# Altium PCB carte_ecureuil2026v2.PcbDoc
Units mil, origin at the board's own origin, x right, y up, seen from the top; angles counter-clockwise.
Board outline 3267.72 x 2125.98 mil, 2 copper layers (Top Layer, Bottom Layer); 41 components, 34 nets, 132 pads, 0 vias.
Unrouted connection lines stored in the file: 30.
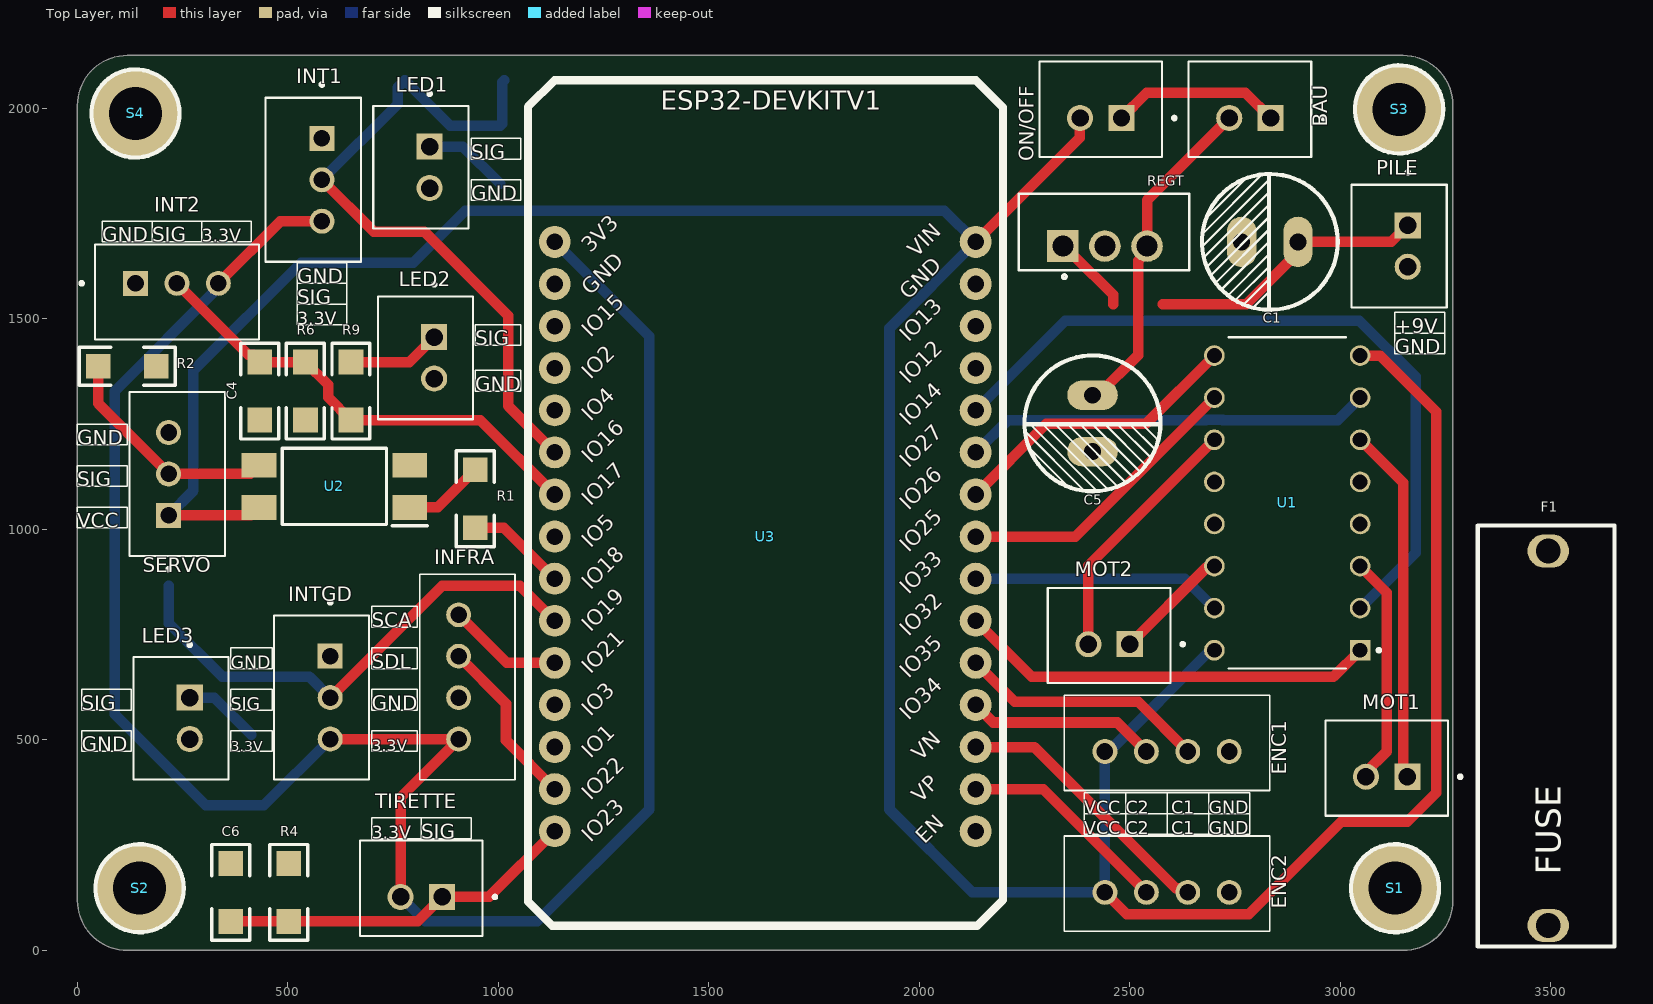
[diagram p0: Top Layer view]
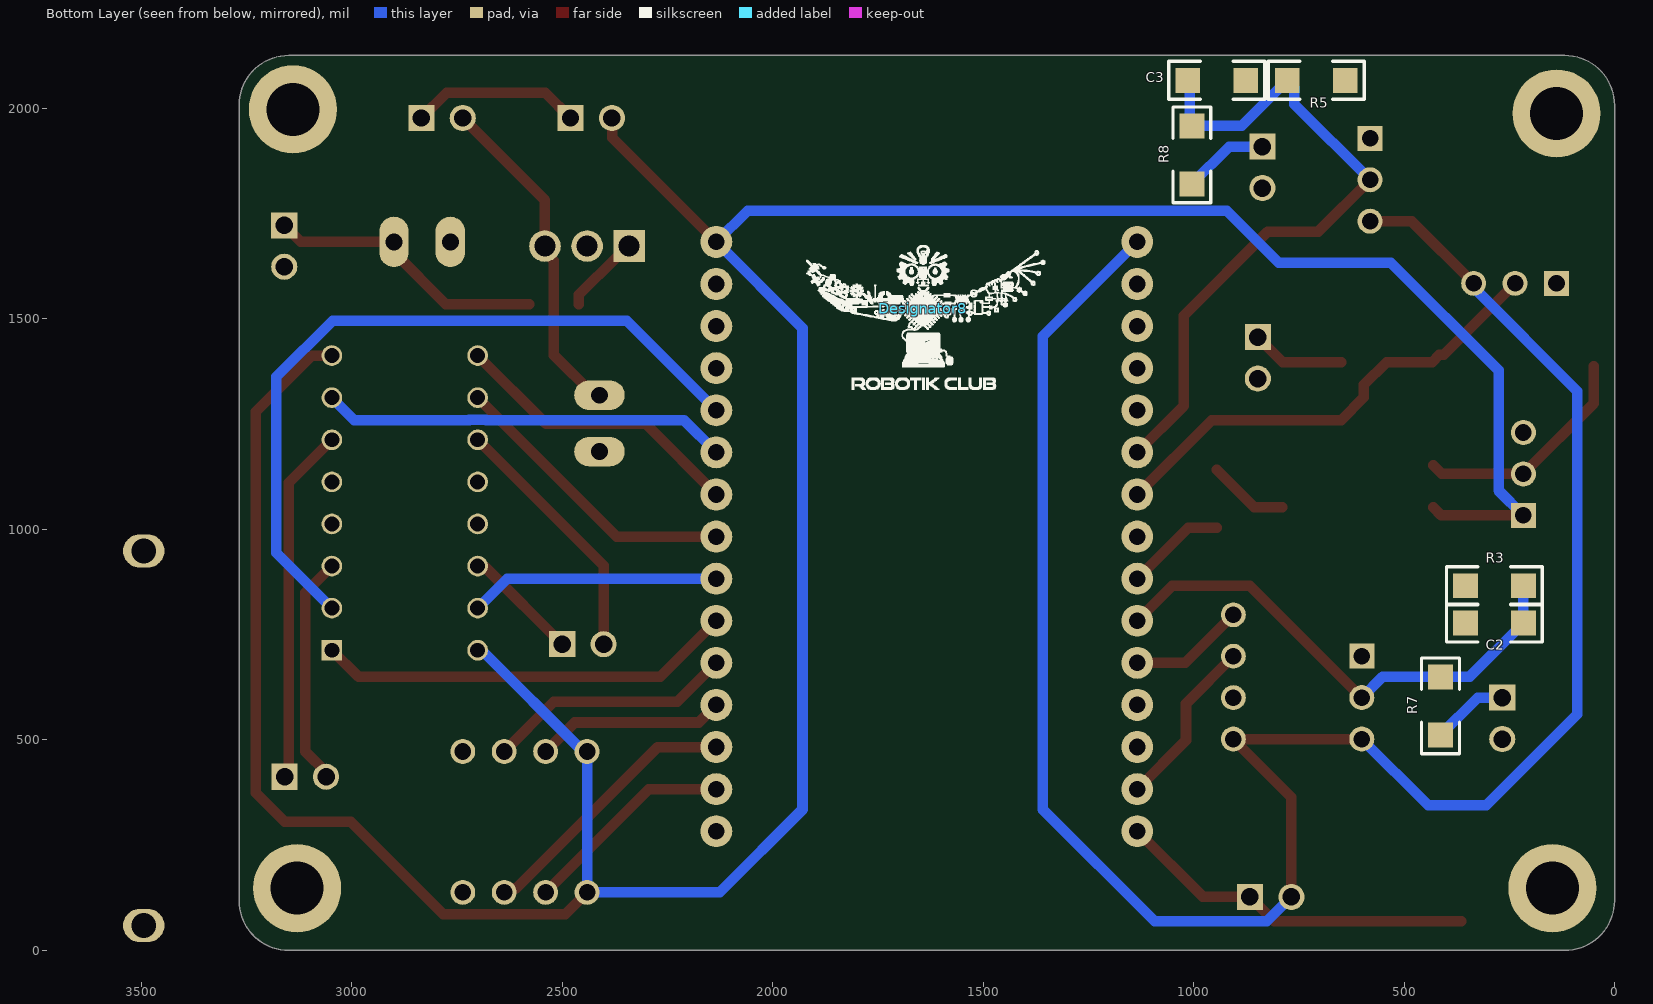
[diagram p1: Bottom Layer view, seen from below]

## Layer stack, top to bottom
Top Solder: solder mask 0.4, Solder Resist, Dk 3.5
Top Layer: signal copper 1.4
Dielectric 1: dielectric 12.6, FR-4, Dk 4.8
Bottom Layer: signal copper 1.4
Bottom Solder: solder mask 0.4, Solder Resist, Dk 3.5

## Board outline
118.11,0 3149.61,0 ccw(c3149.61,118.11) 3267.72,118.11 3267.72,2007.88 ccw(c3149.61,2007.88) 3149.61,2125.98 118.11,2125.98 ccw(c118.11,2007.87) 0,2007.87 0,118.11 ccw(c118.11,118.11)

## Design rules (kind name [scope] priority, off if disabled: settings)
Clearance [All] p1: gap=10 ignorepadtopadclearanceinfootprint=FALSE
PolygonConnect [All] p1: connectstyle=Relief reliefconductorwidth=10 reliefentries=4 polygonreliefangle="90 Angle" airgapwidth=10
RoutingVias [All] p1: holewidth=28 width=50 viastyle="Through Hole" minholewidth=28 minwidth=50 maxholewidth=28 maxwidth=50
SolderMaskExpansion [All] p1: expansion=4 istentingtop=FALSE
SupplyNets "Schematic Supply Nets_2" [InNet('GND')] p1: voltage=0.000
SupplyNets "Schematic Supply Nets_1" [InNet('VCC')] p2: voltage=0.000
SupplyNets "Schematic Supply Nets" [InNet('3.3V')] p3: voltage=0.000
Width [All] p1: maxlimit=50 minlimit=10 preferedwidth=10 minimp=50.000000 maximp=50.000000 favimp=50.000000
30 further rules are at their usual default settings.

## Components (designator, comment, footprint, x,y, rotation, side; value= is the part's Value field where it differs from the comment)
BAU "Header 2H" JST_B2B-XH-A_(LF)(SN) 2785.43,1998.03 r0 top
C1 "35V" Condensateur 2899.61,1683.07 r180 top value=100uF
C2 "Cap" "Capacitor 1206" 285.43,777.56 r180 bottom value=1µF
C3 "Cap" "Capacitor 1206" 944.88,2066.93 r0 bottom value=1µF
C4 "Cap" "Capacitor 1206" 433.07,1328.74 r90 top value=1µF
C5 "35V" Condensateur 2411.42,1318.9 r270 top value=100nF
C6 "Cap" "Capacitor 1206" 364.17,137.8 r270 top value=1µF
Designator8 "Comment" Logo_lowres 1643.7,1525.59 r180 bottom
ENC1 "Header 4" B4BXHALFSN 2440.94,472.44 r0 top
ENC2 "Header 4" B4BXHALFSN 2440.94,137.8 r0 top
F1 "2A max" Fuse 3494.09,59.05 r90 top
INFRA "Header 4" B4BXHALFSN 905.51,797.24 r270 top
INT1 "Header 3" JST_B3B-XH-A(LF)(SN) 560.04,1830.71 r90 top
INT2 "Header 3" JST_B3B-XH-A(LF)(SN) 236.22,1563.98 r180 top
INTGD "Header 3" JST_B3B-XH-A(LF)(SN) 579.72,600.39 r90 top
LED1 "Header 2H" JST_B2B-XH-A_(LF)(SN) 815.94,1860.24 r90 top
LED2 "Header 2H" JST_B2B-XH-A_(LF)(SN) 826.77,1407.48 r90 top
LED3 "Header 2H" JST_B2B-XH-A_(LF)(SN) 246.06,551.18 r90 top
MOT1 "Header 2H" JST_B2B-XH-A_(LF)(SN) 3110.24,433.07 r0 top
MOT2 "Header 2H" JST_B2B-XH-A_(LF)(SN) 2450.79,748.03 r0 top
ON/OFF "Header 2H" JST_B2B-XH-A_(LF)(SN) 2431.1,1998.03 r0 top
PILE "Header 2H" JST_B2B-XH-A_(LF)(SN) 3139.76,1673.23 r90 top
R1 "Res2" "Resistor 1206" 944.88,1072.83 r90 top value=150
R2 "Res2" "Resistor 1206" 118.11,1387.8 r180 top value=10K
R3 "Res2" "Resistor 1206" 285.43,866.14 r180 bottom value=10K
R4 "Res2" "Resistor 1206" 501.97,137.8 r270 top value=10K
R5 "Res2" "Resistor 1206" 708.66,2066.93 r0 bottom value=10K
R6 "Res2" "Resistor 1206" 541.34,1328.74 r90 top value=10K
R7 "Res2" "Resistor 1206" 413.39,580.71 r270 bottom value=330
R8 "Res2" "Resistor 1206" 1003.94,1889.76 r270 bottom value=330
R9 "Res2" "Resistor 1206" 649.61,1328.74 r90 top value=330
REGT "L7805ACV" TO254P460X1020X1945-3P 2440.94,1673.23 r90 top
S1 "Screw M3" "Screw M3" 3129.92,147.64 r0 top
S2 "Screw M3" "Screw M3" 147.64,147.64 r0 top
S3 "Screw M3" "Screw M3" 3139.76,1998.03 r0 top
S4 "Screw M3" "Screw M3" 137.8,1988.19 r0 top
SERVO "Header 3" JST_B3B-XH-A(LF)(SN) 237.2,1131.89 r270 top
TIRETTE "Header 2H" JST_B2B-XH-A_(LF)(SN) 816.93,147.64 r0 top (schematic designator tirette)
U1 "L293D" DIP880W50P254L2000H510Q16 2874.02,1062.99 r180 top
U2 "FOD817S" SOP254P1016X385-4N 610.24,1102.36 r180 top
U3 "ESP32-DEVKITC-32D" MODULE_ESP32-DEVKITV1 1633.86,1092.52 r0 top

## Footprints (in the part's own frame and the unit in brackets; to place one, negate y for a bottom-side part, rotate by r counter-clockwise, add the part's x,y. Pads: shape width x height; smd on the part's side, far side on the other; paste and mask are expansions set on the pad)
B4BXHALFSN [mm]
  round 1.5 hole 1: 1(0,0) 2(2.5,0) 3(5,0) 4(7.5,0)
  silkscreen extent -2.45,-2.35 9.95,3.4, body extent -2.45,-2.35 9.95,3.4, height 7.52
"Capacitor 1206" [mm]
  rect 1.5x1.5 smd: 1(-1.75,0) 2(1.75,0)
  silkscreen extent -2.89,-1.14 2.89,1.14, body extent -1.97,-0.99 1.97,0.96, height 1.3
Condensateur [mil]
  oval 70x120 hole 40: 1(0,0) 2(133.86,0)
  silkscreen extent -94,-161 228,161, body extent -93,-160 227,160, height 500
DIP880W50P254L2000H510Q16 [mm]
  rect 1.25x1.25 / inner round 1.25 / far side rect 1.25x1.25 hole 0.9: 1(-4.4,8.89)
  round 1.25 hole 0.9: 2(-4.4,6.35) 3(-4.4,3.81) 4(-4.4,1.27) 5(-4.4,-1.27) 6(-4.4,-3.81) 7(-4.4,-6.35) 8(-4.4,-8.89) 9(4.4,-8.89) 10(4.4,-6.35) 11(4.4,-3.81) 12(4.4,-1.27) 13(4.4,1.27) 14(4.4,3.81) 15(4.4,6.35) 16(4.4,8.89)
  silkscreen extent -5.63,-10 3.55,10, body extent -10,-4.62 10,4.62, height 5.1
Fuse [mm] "Porte-fusible monté sur circuit 10 (UL) A, 6.3 (VDE) A, fusible Cartouche, 893-0574"
  round 2 hole 3: 0(11.43,0)
  oval 2x2.5 hole 1.5: 1(0,0) 2(22.6,0)
  silkscreen extent -1.27,-4 24.13,4.25, body extent -1.27,-4.29 24.13,4.29, height 11.41
JST_B2B-XH-A_(LF)(SN) [mm]
  rect 1.575x1.575 / inner round 1.575 / far side rect 1.575x1.575 hole 1.05: 1(1.25,-0.525)
  round 1.575 hole 1.05: 2(-1.25,-0.525)
  silkscreen extent -3.7,-2.88 4.54,2.88, body extent -3.7,-2.88 3.7,2.88, height 7
JST_B3B-XH-A(LF)(SN) [mm]
  rect 1.508x1.508 / inner round 1.508 / far side rect 1.508x1.508 hole 1: 1(2.5,-0.525)
  round 1.508 hole 1: 2(0,-0.525) 3(-2.5,-0.525)
  silkscreen extent -4.95,-2.88 5.85,2.88, body extent -4.95,-2.88 4.95,2.88, height 7
Logo_lowres [mil]
  silkscreen extent -276,-194 291,148
MODULE_ESP32-DEVKITV1 [mil]
  round 76 / inner round 60 / far side round 76 hole 39.37: 1(-500,590.55) 2(-500,490.55) 3(-500,390.55) 4(-500,290.55) 5(-500,190.55) 6(-500,90.55) 7(-500,-9.45) 8(-500,-109.45) 9(-500,-209.45) 10(-500,-309.45) 11(-500,-409.45) 12(-500,-509.45) 13(-500,-609.45) 14(-500,-709.45) 15(-500,-809.45) 16(500,-809.45) 17(500,-709.45) 18(500,-609.45) 19(500,-509.45) 20(500,-409.45) 21(500,-309.45) 22(500,-209.45) 23(500,-109.45) 24(500,-9.45) 25(500,90.55) 26(500,190.55) 27(500,290.55) 28(500,390.55) 29(500,490.55) 30(500,590.55)
  silkscreen extent -563,-1034 565,974, body extent -560,-1027 562,978, height 283
"Resistor 1206" [mm]
  rect 1.5x1.5 smd: 1(-1.75,0) 2(1.75,0)
  silkscreen extent -2.89,-1.14 2.89,1.14, body extent -1.98,-0.95 1.98,0.93, height 0.55
"Screw M3" [mm] "M3 iso Screw"
  round 5.32 hole 3.2 unplated: 0(0,0)
  silkscreen extent -2.66,-2.66 2.66,2.66
SOP254P1016X385-4N [mm]
  rect 2.1x1.5 smd: 1(-4.55,1.27) 2(-4.55,-1.27) 3(4.55,-1.27) 4(4.55,1.27)
  silkscreen extent -5.6,-2.3 3.15,2.37, body extent -5.08,-2.3 5.08,2.3, height 3.85
TO254P460X1020X1945-3P [mm]
  rect 1.91x1.91 / inner round 1.91 / far side rect 1.91x1.91 hole 1.27: 1(0,2.54)
  round 1.91 hole 1.27: 2(0,0) 3(0,-2.54)
  silkscreen extent -1.96,-5.1 3.15,5.21, body extent -5.1,-2.25 5.1,2.25, height 19.68

## Part data
BAU LED1 LED2 LED3 MOT1 MOT2 ON/OFF PILE TIRETTE: "Header, 2-Pin, Right Angle", LatestRevisionDate=17-Jul-2002, LatestRevisionNote="Re-released for DXP Platform.", Publisher="Altium Limited"
C1 C5: library part "Cap Pol1", "Polarized Capacitor (Radial)", LatestRevisionDate=17-Jul-2002, LatestRevisionNote="Re-released for DXP Platform.", PackageDescription="Polarized Capacitor (Radial); 2 Leads", PackageReference=RB7.6-15, Published=8-Jun-2000, Publisher="Altium Limited"
C2 C3 C4 C6: "Capacitor", LatestRevisionDate=17-Jul-2002, LatestRevisionNote="Re-released for DXP Platform.", PackageDescription="Radial Cap, Thru-Hole; 2 Leads; 0.3 in Pin Spacing", PackageReference=RAD-0.3, Published=8-Jun-2000, Publisher="Altium Limited"
ENC1 ENC2 INFRA: "Header, 4-Pin", LatestRevisionDate=17-Jul-2002, LatestRevisionNote="Re-released for DXP Platform.", Publisher="Altium Limited"
F1: library part "Fuse 2", "Main Fuse", LatestRevisionDate=17-Jul-2002, LatestRevisionNote="Re-released for DXP Platform.", PackageDescription="Thru-Hole; 2 Leads", PackageReference=PIN-W2/E2.8, Published=8-Jun-2000, Publisher="Altium Limited"
INT1 INT2 INTGD SERVO: "Header, 3-Pin", LatestRevisionDate=17-Jul-2002, LatestRevisionNote="Re-released for DXP Platform.", Publisher="Altium Limited"
R1 R2 R3 R4 R5 R6 R7 R8 R9: "Resistor", LatestRevisionDate=17-Jul-2002, LatestRevisionNote="Re-released for DXP Platform.", PackageDescription="Axial Device, Thru-Hole; 2 Leads; 0.4 in Pin Spacing", PackageReference=AXIAL-0.4, Published=8-Jun-2000, Publisher="Altium Limited"
REGT: "Linear Voltage Regulator IC Positive Fixed 1 Output 1.5A TO-220", Package="TO-220-3 STMicroelectronics", Check_prices=https://www.snapeda.com/parts/L7805ACV/STMicroelectronics/view-part/?ref=eda, MF=STMicroelectronics, MP=L7805ACV, SnapEDA_Link=https://www.snapeda.com/parts/L7805ACV/STMicroelectronics/view-part/?ref=snap
U1: "Bipolar Motor Driver - Parallel 16-PowerDIP", Package="DIP-16 STMicroelectronics", Availability="In Stock", Check_prices=https://www.snapeda.com/parts/L293D/STMicroelectronics/view-part/?ref=eda, MF=STMicroelectronics, MP=L293D, Price=None, Purchase-URL=https://pricing.snapeda.com/search/part/L293D/?ref=eda, SnapEDA_Link=https://www.snapeda.com/parts/L293D/STMicroelectronics/view-part/?ref=snap
U2: library part Optoisolator1, "4-Pin Phototransistor Optocoupler", DatasheetVersion=Nov-2003, LatestRevisionDate=04-Mar-2005, LatestRevisionNote="Sch pins 3 & 4 Swapped.", PackageReference=DIP-4, Published=24-Mar-1999, Publisher="Altium Limited"
U3: "Eval Board For Esp-Wroom-32", Package=None, Availability=Unavailable, MF="Espressif Systems", MP=ESP32-DEVKITC-32D, Price=None, SnapEDA_Link=https://www.snapeda.com/parts/ESP32-DEVKITC-32D/Espressif%20Systems/view-part/?ref=snap

## Nets (pads, with @x,y where several pads share a name; then routed paths per layer and width w, separated by ;. In a path a pad name is that pad's centre, name@x,y a point inside that pad or via, vN(x,y) a via of type N, cw(c..) or ccw(c..) an arc to the next point about the centre after c; other vN are vias at no path point)
3.3V: ENC1.1 ENC2.1 INFRA.4 INT1.3 INT2.3 INTGD.3 TIRETTE.2 U3.1 | length 5002.7
  Top Layer w25: INT2.3 482.28,1732.28 INT1.3 ; INTGD.3 INFRA.4 767.72,364.17 TIRETTE.2
  Bottom Layer w25: INT2.3 334.65,1574.8 88.58,1328.74 88.58,561.02 305.12,344.49 442.91,344.49 INTGD.3 ; TIRETTE.2 825.79,68.9 1092.52,68.9 1358.27,334.65 1358.27,1458.66 U3.1
C11: ENC1.3 U3.20 | length 591.2
  Top Layer w25: U3.20 2226.38,590.55 2519.68,590.55 ENC1.3
C12: ENC1.2 U3.19 | length 451.3
  Top Layer w25: U3.19 2175.59,541.34 2470.47,541.34 ENC1.2
C21: ENC2.3 U3.18 | length 647
  Top Layer w25: U3.18 2272.83,483.07 2608.72,147.18 2628.41,147.18 ENC2.3
C22: ENC2.2 U3.17 | length 507.1
  Top Layer w25: U3.17 2294.09,383.07 ENC2.2
"enable 1": U1.1 U3.21 | length 994.9
  Top Layer w25: U3.21 2267.32,649.61 2983.86,649.61 U1.1
"enable 2": U1.9 U3.24 | length 703.6
  Top Layer w25: U3.24 2301.38,1250.59 2538.39,1250.59 U1.9
ESP_PWM: R1.1 U3.9 | length 239
  Top Layer w25: R1.1 1012.99,1003.94 U3.9
GND: C1.2 C2.1 C3.1 C5.2 C6.1 ENC1.4 ENC2.4 INFRA.3 LED1.2 LED2.2 LED3.2 PILE.2 R2.1 R3.1 R4.1 R5.1 REGT.2 SERVO.3 U1.4 U1.5 U1.12 U1.13 U2.2 U3.2 U3.29
I2C_SCL: INFRA.2 U3.14 | length 410.3
  Top Layer w25: INFRA.2 1018.06,586.27 1018.06,498.87 U3.14
I2C_SDA: INFRA.1 U3.11 | length 275.6
  Top Layer w25: INFRA.1 1019.69,683.07 U3.11
M1: MOT1.2 U1.3 | length 547.1
  Top Layer w25: U1.3 3110.24,850 3110.24,472.44 3061.02,423.23 MOT1.2
M2: MOT1.1 U1.6 | length 847.1
  Top Layer w25: U1.6 3149.61,1110.63 3149.61,422.24 MOT1.1
M3: MOT2.2 U1.11 | length 609.6
  Top Layer w25: MOT2.2 2401.57,913.78 U1.11
M4: MOT2.1 U1.14 | length 277.7
  Top Layer w25: MOT2.1 2681,908.36 2696.15,908.36 U1.14
NetBAU_1: BAU.1 ON/OFF.1 | length 404.1
  Top Layer w25: ON/OFF.1 2540.35,2037.4 2774.61,2037.4 BAU.1
NetBAU_2: BAU.2 C5.1 REGT.3 | length 800.5
  Top Layer w25: C5.1 2424.24,1318.9 2519.68,1414.34 2519.68,1638.39 2540.94,1659.65 2540.94,1782.09 BAU.2
NetC1_1: C1.1 F1.2 PILE.1 | length 673.8
  Top Layer w25: 2578.74,1535.43 2776.97,1535.43 2899.61,1658.07 C1.1 3121.06,1683.07 PILE.1
NetC4_1: C4.1 R6.1
NetF1_1: F1.1 REGT.1 | length 189.4
  Top Layer w25: REGT.1 2366.04,1648.13 2369.59,1648.13 2460.63,1557.09 2460.63,1535.43
NetLED1_1: LED1.1 R8.2 | length 204
  Bottom Layer w25: LED1.1 915.35,1909.45 R8.2
NetLED2_1: LED2.1 R9.2 | length 222.3
  Top Layer w25: R9.2 788.39,1397.64 LED2.1
NetLED3_1: LED3.1 R7.2 | length 183.3
  Bottom Layer w25: LED3.1 324.8,600.39 R7.2
NetR1_2: R1.2 U2.1 | length 192.5
  Top Layer w25: U2.1 855.51,1052.36 R1.2
OPT_PWM: R2.2 SERVO.2 U2.3 | length 548.3
  Top Layer w25: R2.2 49.21,1299.21 SERVO.2 410.63,1131.89 U2.3
"Sens1 M1": U1.2 U3.26 | length 1792.8
  Bottom Layer w25: U3.26 2346.85,1496.06 3045.32,1496.06 3179.13,1362.25 3179.13,944.88 U1.2
"Sens1 M2": U1.10 U3.23 | length 703.6
  Top Layer w25: U3.23 2370.87,983.07 U1.10
"Sens2 M1": U1.7 U3.25 | length 967.4
  Bottom Layer w25: U3.25 2210.63,1259.84 2681.02,1259.84 2681.28,1260.1 2720.3,1260.1 2720.56,1259.84 2994.09,1259.84 U1.7
"Sens2 M2": U1.15 U3.22 | length 596
  Bottom Layer w25: U3.22 2630.71,883.07 U1.15
switch_gd: C2.2 INTGD.2 R3.2 R7.1 U3.10 | length 1223.8
  Top Layer w25: INTGD.2 866.14,866.14 1050.79,866.14 U3.10
  Bottom Layer w25: R3.2 C2.2 344.49,649.61 R7.1 551.18,649.61 INTGD.2
switch_R1: C3.2 INT1.2 R5.2 R8.1 U3.6 | length 1648.4
  Top Layer w25: INT1.2 704.41,1707.01 824.36,1707.01 1023.62,1507.75 1023.62,1293.31 U3.6
  Bottom Layer w25: INT1.2 760.53,2010.53 760.53,2049.9 R5.2 885.83,1958.66 R8.1 1008.86,1963.58 1008.86,2062.01 C3.2
switch_R2: C4.2 INT2.2 R6.2 R9.1 U3.7 | length 1122.7
  Top Layer w25: INT2.2 406.2,1414.67 416.04,1414.67 C4.2 R6.2 595.47,1343.5 595.47,1313.98 R9.1 957.09,1259.84 U3.7
tirette: C6.2 R4.2 TIRETTE.1 U3.15 | length 858.4
  Top Layer w25: C6.2 R4.2 808.07,68.9 TIRETTE.1 977.76,126.97 U3.15
VCC: ON/OFF.2 SERVO.1 U1.8 U1.16 U2.4 U3.30 | length 7825.6
  Top Layer w25: SERVO.1 412.2,1033.46 U2.4 ; U3.30 2381.58,1930.79 2381.58,1977.05 ON/OFF.2 ; 2440.94,137.8 2492.97,85.77 2782.62,85.77 3001.97,305.12 3159.45,305.12 3228.35,374.02 3228.35,1279.53 3094.88,1412.99 U1.8
  Bottom Layer w25: SERVO.1 275.59,1092.52 275.59,1377.95 531.5,1633.86 797.24,1633.86 920.91,1757.52 2059.41,1757.52 U3.30 1929.13,1478.35 1929.13,334.65 2125.98,137.8 2440.94,137.8 2440.94,472.44 2450.59,472.44 2691.14,712.99 U1.16
pads on no net: F1.0 INT1.1 INT2.1 INTGD.1 S1.0 S2.0 S3.0 S4.0 U3.3 U3.4 U3.5 U3.8 U3.12 U3.13 U3.16 U3.27 U3.28

## Silkscreen, mask and mechanical layers (free items; w line width, h text height)
Top Overlay:
  lines w3: 177.17,1683.07 59.05,1683.07 59.05,1732.28 177.17,1732.28 ; 177.17,1683.07 177.17,1732.28 ; 177.17,1683.07 295.28,1683.07 ; 177.17,1683.07 177.17,1732.28 ; 177.17,1732.28 295.28,1732.28 ; 295.28,1683.07 413.39,1683.07 413.39,1732.28 295.28,1732.28 ; 295.28,1683.07 295.28,1732.28 ; 295.28,1683.07 295.28,1732.28 ; 521.65,1535.43 639.76,1535.43 ; 521.65,1535.43 521.65,1486.22 639.76,1486.22 639.76,1535.43 ; 521.65,1535.43 639.76,1535.43 ; 521.65,1535.43 521.65,1584.65 ; 521.65,1584.65 639.76,1584.65 ; 521.65,1584.65 639.76,1584.65 ; 521.65,1584.65 521.65,1633.86 639.76,1633.86 639.76,1584.65 ; 639.76,1535.43 639.76,1584.65 ; 816.93,265.75 935.04,265.75 935.04,314.96 816.93,314.96 ; 816.93,265.75 816.93,314.96 ; 816.93,265.75 698.82,265.75 698.82,314.96 816.93,314.96 ; 816.93,265.75 816.93,314.96 ; 2391.73,324.8 2490.16,324.8 ; 2391.73,324.8 2391.73,374.02 2490.16,374.02 ; 2391.73,324.8 2490.16,324.8 ; 2391.73,324.8 2391.73,275.59 2490.16,275.59 ; 2490.16,275.59 2588.58,275.59 ; 2490.16,275.59 2490.16,324.8 ; 2490.16,275.59 2490.16,324.8 ; 2490.16,324.8 2588.58,324.8 ; 2490.16,324.8 2490.16,374.02 ; 2490.16,324.8 2588.58,324.8 ; 2490.16,324.8 2490.16,374.02 ; 2490.16,374.02 2588.58,374.02 ; 2588.58,275.59 2588.58,324.8 ; 2588.58,275.59 2687.01,275.59 ; 2588.58,275.59 2588.58,324.8 ; 2588.58,324.8 2687.01,324.8 ; 2588.58,324.8 2588.58,374.02 ; 2588.58,324.8 2588.58,374.02 ; 2588.58,324.8 2687.01,324.8 ; 2588.58,374.02 2687.01,374.02 ; 2687.01,275.59 2785.43,275.59 2785.43,324.8 ; 2687.01,275.59 2687.01,324.8 ; 2687.01,275.59 2687.01,324.8 ; 2687.01,324.8 2687.01,374.02 ; 2687.01,324.8 2785.43,324.8 ; 2687.01,324.8 2687.01,374.02 ; 2687.01,324.8 2785.43,324.8 ; 2687.01,374.02 2785.43,374.02 2785.43,324.8 ; 3129.92,1466.54 3248.03,1466.54 ; 3129.92,1466.54 3129.92,1417.32 3248.03,1417.32 3248.03,1466.54 ; 3129.92,1466.54 3248.03,1466.54 ; 3129.92,1466.54 3129.92,1515.75 3248.03,1515.75 3248.03,1466.54 ; 0,1003.94 118.11,1003.94 118.11,1053.15 0,1053.15 0,1003.94 ; 0,1102.36 118.11,1102.36 118.11,1151.57 0,1151.57 0,1102.36 ; 0,1200.79 118.11,1200.79 118.11,1250 0,1250 0,1200.79 ; 9.84,472.44 127.95,472.44 127.95,521.65 9.84,521.65 9.84,472.44 ; 9.84,570.87 127.95,570.87 127.95,620.08 9.84,620.08 9.84,570.87 ; 364.17,472.44 462.6,472.44 462.6,521.65 364.17,521.65 364.17,472.44 ; 364.17,570.87 462.6,570.87 462.6,620.08 364.17,620.08 364.17,570.87 ; 364.17,669.29 462.6,669.29 462.6,718.5 364.17,718.5 364.17,669.29 ; 698.82,472.44 807.09,472.44 807.09,521.65 698.82,521.65 698.82,472.44 ; 698.82,570.87 807.09,570.87 807.09,620.08 698.82,620.08 698.82,570.87 ; 698.82,669.29 807.09,669.29 807.09,718.5 698.82,718.5 698.82,669.29 ; 698.82,767.72 807.09,767.72 807.09,816.93 698.82,816.93 698.82,767.72 ; 935.04,1781.5 1053.15,1781.5 1053.15,1830.71 935.04,1830.71 935.04,1781.5 ; 935.04,1879.92 1053.15,1879.92 1053.15,1929.13 935.04,1929.13 935.04,1879.92 ; 944.88,1328.74 1053.15,1328.74 1053.15,1377.95 944.88,1377.95 944.88,1328.74 ; 944.88,1437.01 1053.15,1437.01 1053.15,1486.22 944.88,1486.22 944.88,1437.01
  text "SIG" at 935.04,1879.92 h35
  text "GND" at 935.04,1781.5 h35
  text "GND" at 59.06,1683.07 h35
  text "SIG" at 177.17,1683.07 h35
  text "3.3V" at 295.28,1683.07 h30
  text "GND" at 521.65,1584.65 h35
  text "SIG" at 521.65,1535.43 h35
  text "3.3V" at 521.65,1486.22 h30
  text "+9V" at 3129.92,1466.54 h35
  text "SIG" at 944.88,1437.01 h35
  text "GND" at 3129.92,1417.32 h35
  text "GND" at 944.88,1328.74 h35
  text "GND" at 0,1200.79 h35
  text "SIG" at 0,1102.36 h35
  text "VCC" at 0,1003.94 h35
  text "SCA" at 698.82,767.72 h35
  text "GND" at 364.17,669.29 h30
  text "SDL" at 698.82,669.29 h35
  text "SIG" at 9.84,570.87 h35
  text "SIG" at 364.17,570.87 h30
  text "GND" at 698.82,570.87 h35
  text "GND" at 9.84,472.44 h35
  text "3.3V" at 364.17,472.44 h24
  text "3.3V" at 698.82,472.44 h27
  text "VCC" at 2391.73,324.8 h30
  text "C2" at 2490.16,324.8 h30
  text "C1" at 2598.43,324.8 h30
  text "GND" at 2687.01,324.8 h30
  text "VCC" at 2391.73,275.59 h30
  text "C2" at 2490.16,275.59 h30
  text "C1" at 2598.43,275.59 h30
  text "GND" at 2687.01,275.59 h30
  text "3.3V" at 698.82,265.75 h30
  text "SIG" at 816.93,265.75 h35
Mechanical 1:
  lines w10: 3267.72,2007.87 ccw(c3149.61,2007.87) 3149.61,2125.98 108.27,2125.98 ccw(c113.19,2012.8) 0,2007.87 0,98.43 ccw(c108.27,108.27) 118.11,0 3139.76,0 ccw(c3149.61,118.11) 3267.72,108.27 3267.72,2007.87 ; 3267.72,2007.87 3267.72,2007.87

## Text inside footprints (layer, text, board x,y; h text height)
F1: Top Overlay "FUSE" at 3524.09,179.06 h60 r90
U3: Top Overlay "ESP32-DEVKITV1" at 1386.22,1981.1 h77.5; Top Overlay "3V3" at 1227.17,1646.07 h62 r45; Top Overlay "GND" at 1227.17,1546.07 h62 r45; Top Overlay "IO15" at 1227.17,1446.07 h62 r45; Top Overlay "IO2" at 1227.17,1346.07 h62 r45; Top Overlay "IO4" at 1227.17,1246.07 h62 r45; Top Overlay "IO16" at 1227.17,1146.07 h62 r45; Top Overlay "IO17" at 1227.17,1046.07 h62 r45; Top Overlay "IO5" at 1227.17,946.07 h62 r45; Top Overlay "IO18" at 1227.17,846.07 h62 r45; Top Overlay "IO19" at 1227.17,746.07 h62 r45; Top Overlay "IO21" at 1227.17,646.07 h62 r45; Top Overlay "IO3" at 1227.17,546.07 h62 r45; Top Overlay "IO1" at 1227.17,446.07 h62 r45; Top Overlay "IO22" at 1227.17,346.07 h62 r45; Top Overlay "IO23" at 1227.17,246.07 h62 r45; Top Overlay "VIN" at 2002.76,1635.83 h62 r45; Top Overlay "GND" at 1983.46,1535.43 h62 r45; Top Overlay "IO13" at 1983.46,1435.43 h62 r45; Top Overlay "IO12" at 1983.46,1335.43 h62 r45; Top Overlay "IO14" at 1983.46,1235.43 h62 r45; Top Overlay "IO27" at 1983.46,1135.43 h62 r45; Top Overlay "IO26" at 1983.46,1035.43 h62 r45; Top Overlay "IO25" at 1983.46,935.43 h62 r45; Top Overlay "IO33" at 1983.46,835.43 h62 r45; Top Overlay "IO32" at 1983.46,735.43 h62 r45; Top Overlay "IO35" at 1983.46,635.43 h62 r45; Top Overlay "IO34" at 1983.46,535.43 h62 r45; Top Overlay "VN" at 2011.81,439.77 h62 r45; Top Overlay "VP" at 2011.81,339.77 h62 r45; Top Overlay "EN" at 2021.65,242.52 h62 r45